# EAGLE board lightmeter_proto1 (EAGLE 7.1.0)
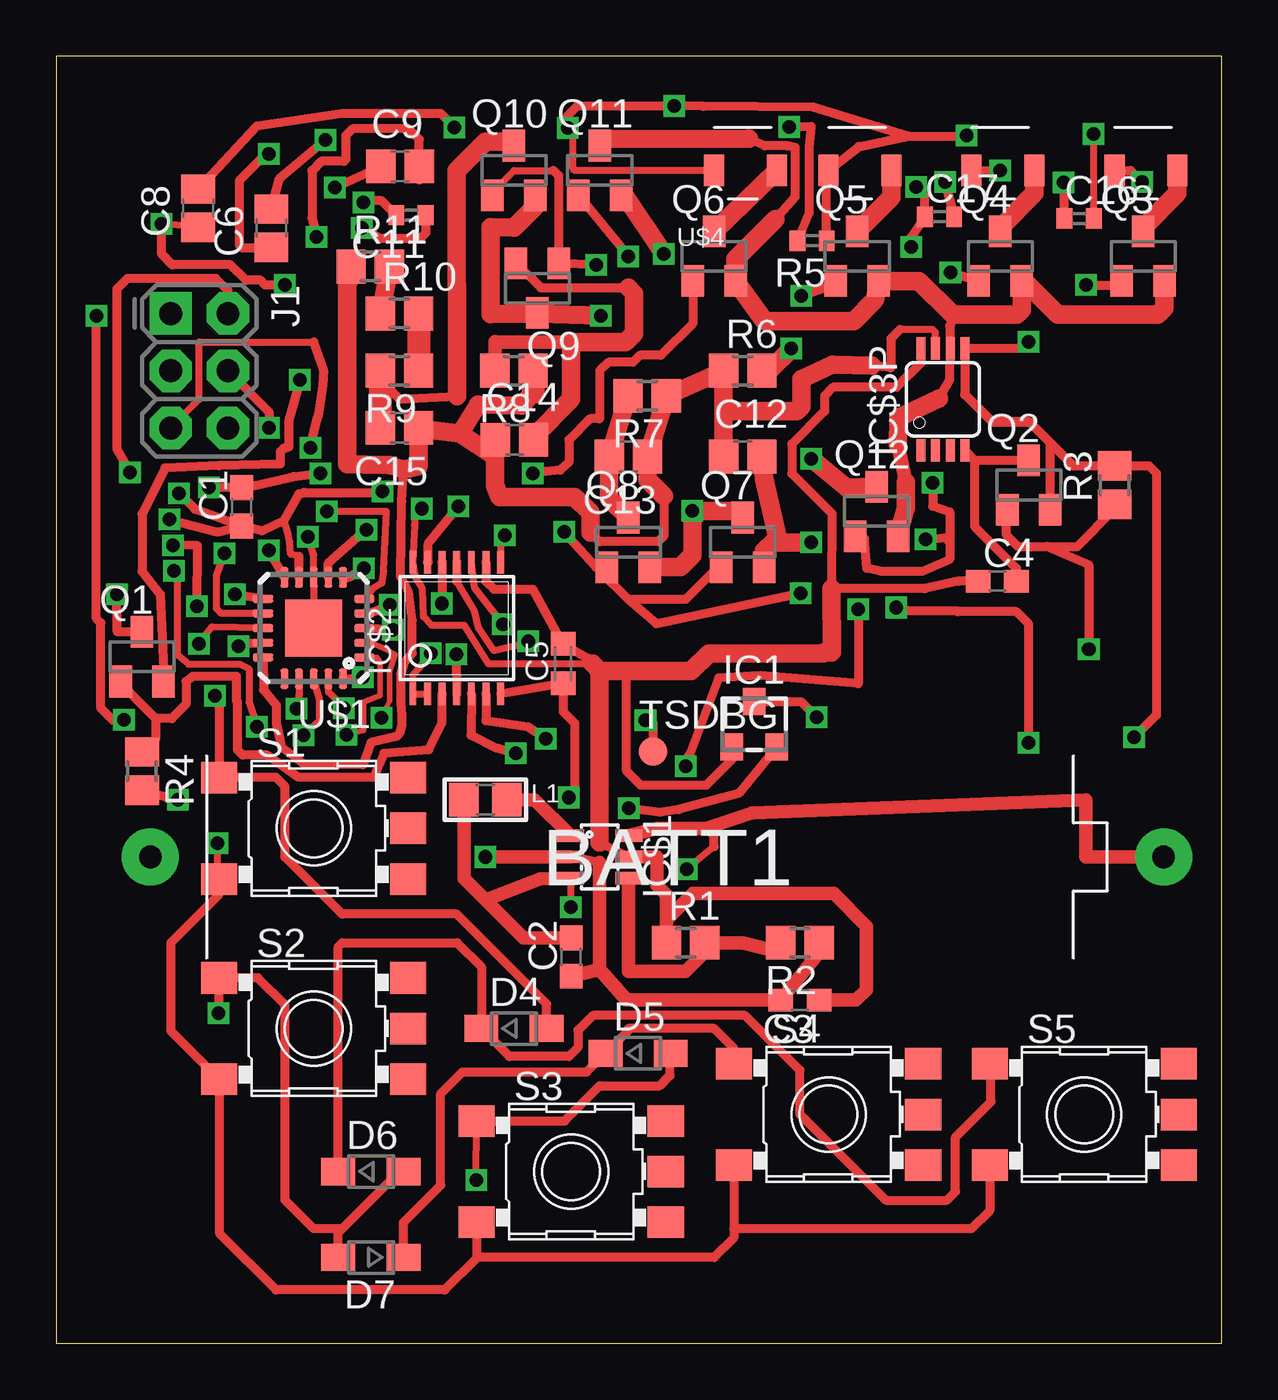
[diagram p0: board, top side]
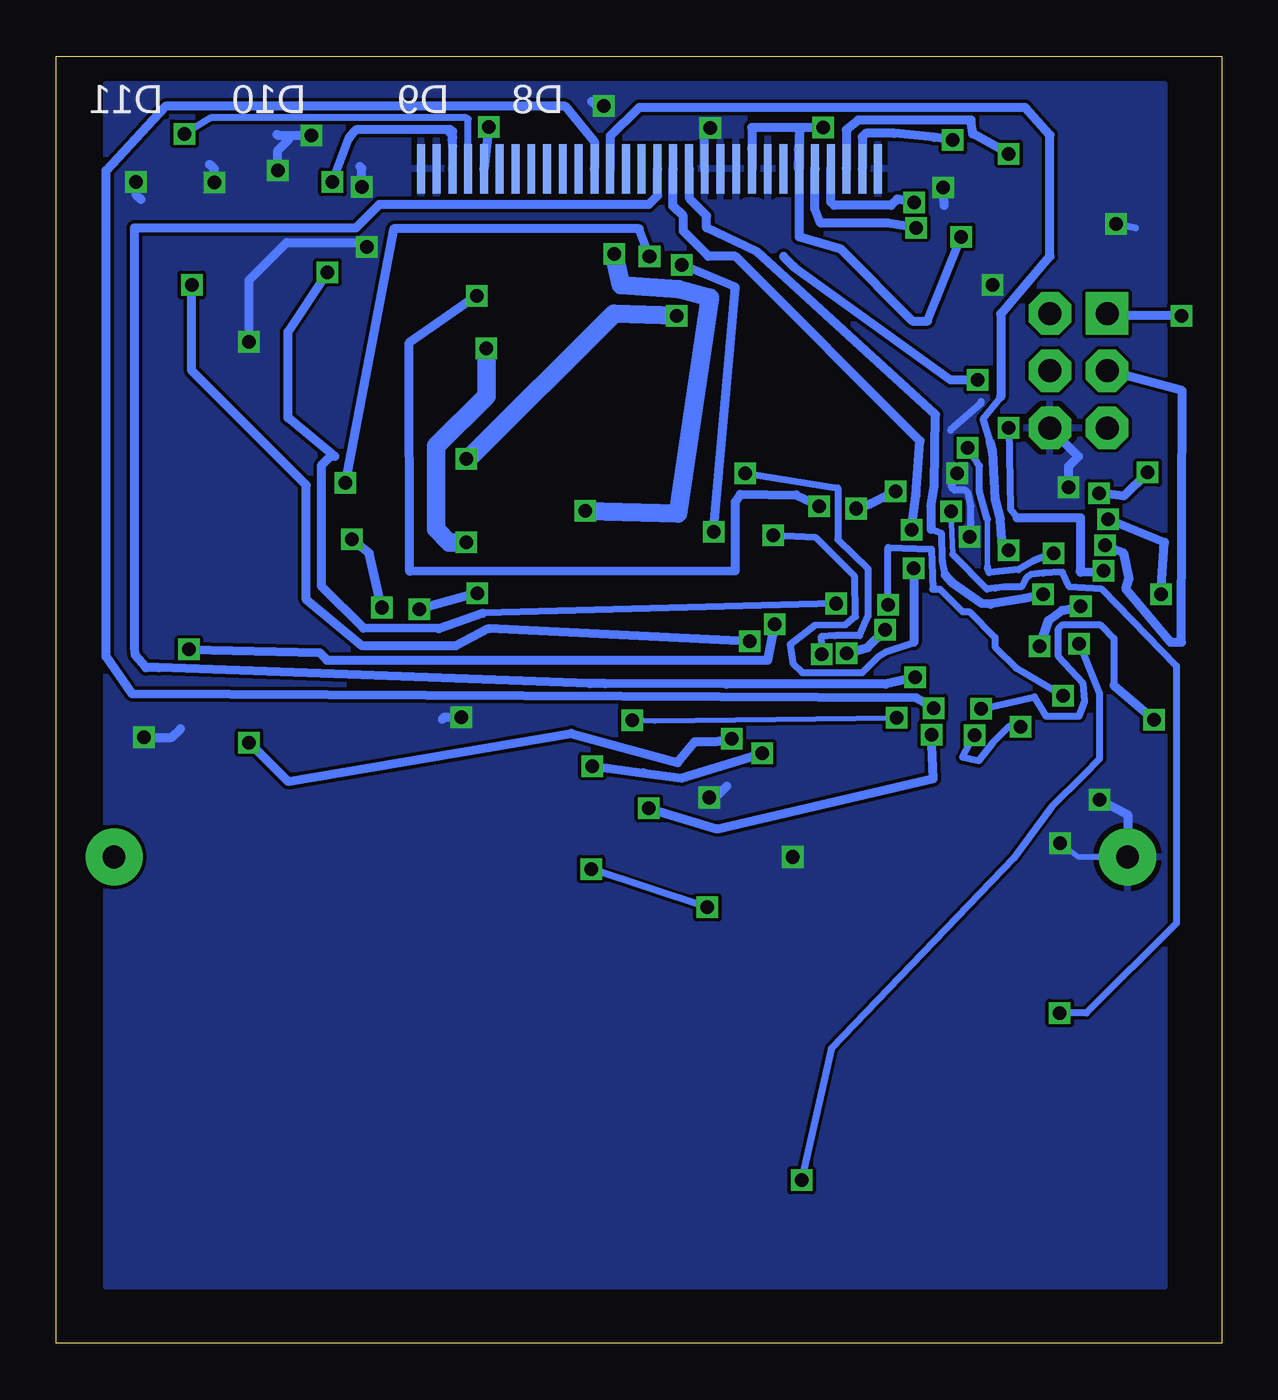
[diagram p1: board, bottom side, seen from below]

Size 51.74 x 57.14 mm. Coordinates in mm from the lower left corner, seen from the top.
Outline: 0,0 51.74,0 51.74,57.14 0,57.14 0,0
Copper layers (1*16): Top 0.0356mm / dielectric 1.5011mm / Bottom 0.0356mm
Design rules "LaenPCBOrder": minimum track width 6mil, minimum drill 13mil, track to track 6mil, track to pad 6mil, pad to pad 6mil, via to via 6mil, smd to smd 6mil, copper to edge 15mil, drill to drill 6mil, minimum pad ring 7mil, minimum via ring 7mil, stop-mask expansion 3mil, vias tented up to drill 0mil, thermal gap 10mil

## Footprints (pad centres in the part's own frame; a part is rotated, then mirrored left to right if it is on the bottom)
12BH412 = drill 1 pad 2.54: + 22.5,0; - -22.5,0
C1608 = smd 1.1 x 1: 1 -0.85,0; 2 0.85,0
C0603K = smd 1.05 x 1.08: 1 -0.875,0; 2 0.875,0
C2012 = smd 1.3 x 1.5: 1 -0.85,0; 2 0.85,0
C0402 = smd 0.7 x 0.9: 1 -0.65,0; 2 0.65,0
SOD323-W = smd 1.5 x 1.2: A 1.45,0; C -1.45,0
VEMD2523SLX01 = smd 0.889 x 1.397: P$1 -3.81,3.81; P$2 -1.016,3.81
SOT-23B = smd 1 x 1.2: 1 -1,-1; 2 1,-1; 3 0,1
SOT23-6L = smd 0.55 x 1.2: 1 -0.95,-1.3; 2 0,-1.3; 3 0.95,-1.3; 4 0.95,1.3; 5 0,1.3; 6 -0.95,1.3
TSSOP14 = smd 0.305 x 0.991: 1 -1.95,-2.918; 2 -1.3,-2.918; 3 -0.65,-2.918; 4 0,-2.918; 5 0.65,-2.918; 6 1.3,-2.918; 7 1.95,-2.918; 8 1.95,2.918; 9 1.3,2.918; 10 0.65,2.918; 11 0,2.918; 12 -0.65,2.918; 13 -1.3,2.918; 14 -1.95,2.918
MSOP08 = smd 0.4 x 1: 1 -0.976,-2.263; 2 -0.326,-2.263; 3 0.324,-2.263; 4 0.974,-2.263; 5 0.974,2.262; 6 0.324,2.262; 7 -0.326,2.262; 8 -0.976,2.262
2X3-NS = drill 1.016 pad 1.88 square: 1 -2.54,-1.27 | drill 1.016 pad 1.88 octagon: 2 -2.54,1.27; 3 0,-1.27; 4 0,1.27; 5 2.54,-1.27; 6 2.54,1.27
0805 = smd 1.3 x 1.5: 1 -0.95,0; 2 0.95,0
SOT23 = smd 1 x 1.4: 1 -0.95,-1.1; 2 0.95,-1.1; 3 0,1.1
R2012 = smd 1.3 x 1.5: 1 -0.85,0; 2 0.85,0
R0402 = smd 0.7 x 0.9: 1 -0.65,0; 2 0.65,0
SKHMPXE010 = smd 1.6 x 1.4: 1 -4.2,2.25; 2 4.2,2.25; 3 -4.2,-2.25; 4 4.2,-2.25; 5 4.2,0
B1,27 = smd 1.27 x 1.27: TP 0,0
MLF20 = smd 0.9 x 0.35: 1 -2.25,1.3; 2 -2.25,0.65; 3 -2.25,0; 4 -2.25,-0.65; 5 -2.25,-1.3; 11 2.25,-1.3; 12 2.25,-0.65; 13 2.25,0; 14 2.25,0.65; 15 2.25,1.3 | smd 0.35 x 0.9: 6 -1.3,-2.25; 7 -0.65,-2.25; 8 0,-2.25; 9 0.65,-2.25; 10 1.3,-2.25; 16 1.3,2.25; 17 0.65,2.25; 18 0,2.25; 19 -0.65,2.25; 20 -1.3,2.25 | smd 2.54 x 2.54: GND 0,0
UG-2864HSWEG01_0.96IN_WRAPAROUND = smd 0.35 x 2.2 bottom: 1 -10.15,-1.2; 2 -9.45,-1.2; 3 -8.75,-1.2; 4 -8.05,-1.2; 5 -7.35,-1.2; 6 -6.65,-1.2; 7 -5.95,-1.2; 8 -5.25,-1.2; 9 -4.55,-1.2; 10 -3.85,-1.2; 11 -3.15,-1.2; 12 -2.45,-1.2; 13 -1.75,-1.2; 14 -1.05,-1.2; 15 -0.35,-1.2; 16 0.35,-1.2; 17 1.05,-1.2; 18 1.75,-1.2; 19 2.45,-1.2; 20 3.15,-1.2; 21 3.85,-1.2; 22 4.55,-1.2; 23 5.25,-1.2; 24 5.95,-1.2; 25 6.65,-1.2; 26 7.35,-1.2; 27 8.05,-1.2; 28 8.75,-1.2; 29 9.45,-1.2; 30 10.15,-1.2

## Placement (x,y rotation side)
BATT1  AAA  [12BH412]  26.67,21.59 0 top
C1  µ1  [C1608]  8.23,37.13 90 top
C2  4µ7  [C1608]  22.86,17.14 90 top
C3  4µ7  [C1608]  33.02,15.24 180 top
C4  µ1  [C1608]  41.78,33.83 0 top
C5  µ1  [C0603K]  22.5,30.18 90 top
C6  1µ  [C2012]  9.55,49.5 90 top
C8  1µ  [C2012]  6.3,50.39 90 top
C9  1µ  [C2012]  15.27,52.25 0 top
C11  1µ  [C0402]  15.75,50.09 180 top
C12  4µ7  [C2012]  30.48,39.37 0 top
C13  4µ7  [C2012]  25.4,39.37 180 top
C14  4µ7  [C2012]  20.35,40.11 0 top
C15  4µ7  [C2012]  15.24,40.64 180 top
C16  4µ7  [C0402]  45.42,49.94 0 top
C17  2µ2  [C0402]  39.22,50.01 0 top
D4  [SOD323-W]  20.32,13.97 0 top
D5  [SOD323-W]  25.83,12.88 0 top
D6  [SOD323-W]  13.97,7.62 0 top
D7  [SOD323-W]  13.97,3.81 180 top
D8  VEMD2523SLX01  [VEMD2523SLX01]  33.02,48.26 0 top
D9  VEMD2523SLX01  [VEMD2523SLX01]  38.1,48.26 0 top
D10  VEMD2523SLX01  [VEMD2523SLX01]  44.45,48.26 0 top
D11  VEMD2523SLX01  [VEMD2523SLX01]  50.8,48.26 0 top
IC1  TC1047SOT-23B  [SOT-23B]  30.99,27.48 0 top
IC$1  TI-TLV61220  [SOT23-6L]  24.13,21.59 270 top
IC$2  SN74HC164TSSOP-14  [TSSOP14]  17.78,31.75 0 top
IC$3P  AD8542RM  [MSOP08]  39.37,41.91 0 top
J1  AVR_SPI_PRG_6NS  [2X3-NS]  6.35,43.18 270 top
L1  4µ7  [0805]  19.05,24.13 0 top
Q1  BSS123  [SOT23]  3.81,30.48 0 top
Q2  BSS123  [SOT23]  43.18,38.1 0 top
Q3  BSS123  [SOT23]  48.26,48.26 0 top
Q4  BSS123  [SOT23]  41.91,48.26 0 top
Q5  BSS123  [SOT23]  35.56,48.26 0 top
Q6  BSS123  [SOT23]  29.21,48.26 0 top
Q7  BSS84  [SOT23]  30.48,35.56 0 top
Q8  BSS123  [SOT23]  25.4,35.56 0 top
Q9  BSS84  [SOT23]  21.36,46.84 180 top
Q10  BSS123  [SOT23]  20.32,52.07 0 top
Q11  BSS84  [SOT23]  24.13,52.07 0 top
Q12  BSS123  [SOT23]  36.42,36.93 0 top
R1  1M  [R2012]  27.94,17.78 0 top
R2  220k  [R2012]  33.02,17.78 180 top
R3  10k  [R2012]  46.99,38.1 90 top
R4  10k  [R2012]  3.81,25.4 270 top
R5  390k  [R0402]  33.55,48.95 180 top
R6  16k  [R2012]  30.48,43.18 0 top
R7  130k  [R2012]  26.24,42.06 180 top
R8  390k  [R2012]  20.32,43.18 180 top
R9  1M  [R2012]  15.24,43.18 180 top
R10  1M  [R2012]  15.24,45.72 0 top
R11  1M  [R2012]  13.94,47.8 0 top
S1  SKHMPSE010  [SKHMPXE010]  11.43,22.86 0 top
S2  SKHMPSE010  [SKHMPXE010]  11.43,13.97 0 top
S3  SKHMPSE010  [SKHMPXE010]  22.86,7.62 0 top
S4  SKHMPSE010  [SKHMPXE010]  34.29,10.16 0 top
S5  SKHMPSE010  [SKHMPXE010]  45.64,10.16 0 top
TSDBG  TPB1,27  [B1,27]  26.49,26.26 0 top
U$1  ATTINY1634MLF20  [MLF20]  11.43,31.75 180 top
U$4  [UG-2864HSWEG01_0.96IN_WRAPAROUND]  25.4,53.34 0 top

## Library data of the parts
BATT1 = adafruit
C1-C6 C8 C9 C11-C17 = rcl
D4-D7 = diode2
D8-D11 IC$2 = lightmeter
IC1 = tc1047
IC$1 = custom
IC$3P = analog-devices; MPN: AD8542ARZ; OC_FARNELL: 1464965; OC_NEWARK: 19M0965
J1 = SparkFun-Connectors
L1 U$4 = microbuilder
Q1-Q12 = transistor-small-signal
R1-R11 = resistor; SPICEPREFIX: R
S1-S5 = switch
TSDBG = testpad
U$1 = attiny1634

## Nets
AVRMISO: J1.1 U$1.17
AVRMOSI: J1.4 U$1.18
AVRRST: J1.5 U$1.12
AVRSCK: J1.3 U$1.14
DIODESW$1: IC$2.4 Q6.1
DIODESW$2: IC$2.13 Q5.1
DIODESW$3: IC$2.12 Q4.1
DIODESW$4: IC$2.11 Q3.1
GND: BATT1.- C1.2 C2.1 C3.2 C5.1 C8.1 C9.1 C16.1 C17.1 D8.P$1 D9.P$1 D10.P$1 D11.P$1 IC1.3 IC$1.2 IC$2.7 IC$3P.5 J1.6 Q2.2 R2.1 R3.2 R4.2 R5.1 S1.3 S2.3 S3.3 S4.3 S5.3 U$1.8 U$1.GND U$4.1 U$4.8 U$4.10 U$4.11 U$4.12 U$4.29 U$4.30
N$1: IC$1.1 L1.2
N$2: D8.P$2 Q6.3
N$3: C14.2 Q9.2 R8.2
N$4: C12.2 Q7.2 R6.2
N$5: D9.P$2 Q5.3
N$6: C4.2 IC$3P.4 Q2.3
N$7: D5.C D7.C S4.1
N$8: D4.C D6.C S5.1
N$9: D10.P$2 Q4.3
N$10: IC$1.4 R1.2 R2.2
N$11: D11.P$2 Q3.3
N$12: C16.2 U$4.27
N$13: R9.1 R10.2
N$14: C13.2 Q8.3 R7.2
N$15: C6.2 U$4.2
N$16: C6.1 U$4.3
N$17: C8.2 C9.2 U$4.6 U$4.9
N$18: R10.1 R11.2
N$19: R5.2 U$4.26
N$20: Q9.3 Q10.2 Q12.3
N$21: C15.2 Q10.3 R9.2
N$22: Q7.3 Q8.2 Q11.2
N$23: TSDBG.TP U$1.2
N$24: C11.1 U$4.5
N$25: C17.2 U$4.28
N$26: IC$3P.6 Q3.2 Q4.2 Q5.2 Q6.2 Q11.3 Q12.2
N$27: C11.2 U$4.4
N$28: IC1.2 U$1.1
OAOUT: C12.1 C13.1 C14.1 C15.1 IC$3P.7 R6.1 R7.1 R8.1 R11.1 U$1.15
OAPWR: IC$2.10 Q2.1 R3.1
PBI$1: D4.A S1.1 U$1.4
PBI$2: D6.A D7.A S2.1 U$1.5
PBI$3: D5.A S3.1 U$1.13
SCRCLK: U$1.10 U$4.18
SCRCS: U$1.11 U$4.13
SCRDAT: U$1.19 U$4.19
SCRDC: U$1.20 U$4.15
SCRPWR: IC$2.3 Q1.1 R4.1
SCRRES: U$1.7 U$4.14
SCRVREG: Q1.2
SRA: IC$2.1 IC$2.2 U$1.3
SRCLK: IC$2.8 U$1.6
STG$1: IC$2.5 Q7.1 Q8.1 Q9.1 Q10.1
STG$2: IC$2.6 Q11.1 Q12.1
VCC: BATT1.+ C2.2 IC$1.3 IC$1.6 L1.1
VREG: C1.1 C3.1 C4.1 C5.2 IC1.1 IC$1.5 IC$2.9 IC$2.14 IC$3P.8 J1.2 Q1.3 R1.1 U$1.9

## Tracks (layer width: path | path; a pad name or v marks a point on that pad's centre or on a via)
AVRMISO  (via drill 0.6)
  Top 0.305: v10.67,28.17 10.78,28.81 U$1.17
  Top 0.406: v3,27.69 2.52,27.66 1.98,28.19 1.98,31.98 1.78,32.18 v1.78,45.62
  Bottom 0.305: v10.67,28.17 8.31,28.7 7.8,27.84 6.32,27.84 6.07,28.5 6.15,29.29 7.24,30.48 7.24,31.72 7.06,31.9 5.39,31.9 4.77,31.29 4.77,29.21
  Bottom 0.406: 4.77,29.21 v3,27.69 | v1.78,45.62 4.98,45.62 J1.1
AVRMOSI  (via drill 0.6)
  Top 0.305: v5.23,34.29 5.36,33.83 5.36,30.58 5.87,30.15 8.15,30.15 8.56,29.95 8.56,28.45 v8.91,27.38 | U$1.18 11.68,28.6 11.68,27.64 v10.97,27
  Top 0.406: J1.4 9.45,41.35 v9.45,40.64
  Bottom 0.305: v9.45,40.64 9.37,37.03 9.07,36.65 | v8.91,27.38 9.45,27.38 10.16,26.67 10.79,25.86 11.51,26.01 v10.97,27
  Bottom 0.406: 9.07,36.65 6.25,36.65 6.27,36.63 6.27,34.27 6.25,34.24 v5.23,34.29
AVRRST  (via drill 0.6)
  Top 0.305: J1.5 6.35,41.91 6.35,44.45 11.43,44.45 | U$1.12 7.33,32.4 7.11,32.61 7.11,34.09 v7.47,35.08
  Top 0.406: 11.43,44.45 11.86,43.2 11.84,42.52 11.66,41.33 11.61,41.12 v11.28,39.75
  Bottom 0.254: 10.39,34.47 10.39,36.58
  Bottom 0.305: v7.47,35.08 8.33,34.75 9.02,34.34 10.31,34.21 10.39,34.47 | 10.39,36.58 10.74,37.85 10.74,38.96 10.85,39.06 10.85,39.09 v11.28,39.75
AVRSCK  (via drill 0.6)
  Top 0.406: v6.25,32.72 6.27,35.41 v5.18,35.43 | v8.08,30.94 8.43,30.99 8.53,31.09 U$1.14
  Bottom 0.406: v5.18,35.43 4.37,35.1 4.11,33.93 4.24,33.48 2.26,31.11 1.78,31.11 1.75,42.29 J1.3 | v8.08,30.94 7.67,32.11 7.09,32.54 v6.25,32.72
DIODESW$1  (via drill 0.6)
  Top 0.406: Q6.1 28.26,45.28 26.85,43.87 25.91,43.87 25.6,43.56 24.51,43.56 24.13,43.18 24.13,41.07 24.11,41.05 23.7,41.05 22.76,40.11 22.76,39.12 22.38,38.76 21.74,38.71 v21.16,38.63 | v17.75,30.58 IC$2.4
  Bottom 0.305: v21.16,38.63 17.04,37.97 17.04,35.69 15.7,34.39 15.7,32.28 16.08,31.42 17.14,31.42 17.78,31.37 v17.75,30.58
DIODESW$2  (via drill 0.6)
  Top 0.406: IC$2.13 16.51,34.67 16.51,35.51 v17.86,37.16 | v33.07,46.51 34.44,46.99 Q5.1
  Bottom 0.406: v33.07,46.51 36.07,44.43 36.04,34.27 21.59,34.29 21.59,37.36 21.36,37.69 18.9,37.67 v17.86,37.16
DIODESW$3  (via drill 0.6)
  Top 0.406: IC$2.12 v17.12,32.84 | v39.7,47.55 Q4.1
  Bottom 0.305: v17.12,32.84 32.79,32.41
  Bottom 0.406: 32.79,32.41 34.75,31.72 38.1,31.75 39.98,33.63 39.98,38.96 39.57,39.37 39.37,39.37 41.45,41.1 41.45,44.91 v39.7,47.55
DIODESW$4  (via drill 0.6)
  Top 0.305: 17.78,33.83 18.57,32.51 18.75,31.75 19.41,30.76 20.37,30.99 v20.96,31.17
  Top 0.406: IC$2.11 17.78,33.83 | v45.72,46.99 47.14,46.99 Q3.1
  Bottom 0.406: v20.96,31.17 32.54,31.72 34.01,30.96 38.15,30.96 40.64,33.02 40.64,38.1 45.72,43.18 v45.72,46.99
GND  (via drill 0.6)
  Top 0.305: S1.3 7.16,20.61 v7.16,22.2 | C8.1 v4.67,49.71 | U$1.GND U$1.8 11.43,35 v11.18,35.81 | D8.P$1 23.02,52.07 U$4.12 22.95,53.71 v22.71,53.95
  Top 0.406: 24.13,21.34 IC$1.2 | S1.3 7.23,19.93 5.08,17.78 5.08,13.87 S2.3 7.26,11.69 7.26,4.85 9.75,2.36 17.25,2.36 18.66,3.78 | S3.3 18.66,3.78 | S4.3 30.09,5.08 | 30.09,5.08 30.09,4.69 29.21,3.81 18.69,3.81 18.66,3.78 | S5.3 41.44,5.88 40.64,5.08 30.09,5.08 | v5.41,24.13 R4.2 4.21,24.55 | IC$3P.5 | Q2.2 44.13,40 | 44.13,40 43.2,40.92 41.55,40.92 40.36,42.11 40.36,44.16 IC$3P.5 | R3.2 45.17,38.95 44.13,40 | IC$2.7 C5.1 22.5,28.04 23.01,27.53 23.01,24.49 v22.76,24.23 | IC1.3 33.06,28.48 v33.76,27.79 | v10.16,46.99 9.27,46.99 9.07,47.19 8.43,47.19 7.72,47.88 5.16,47.88 4.67,48.39 v4.67,49.71 | v6.78,38 6.8,37.98 C1.2 8.89,38.1 10.54,38.48 v11.74,38.63 | D11.P$1 47.7,52.07 v48.21,51.56 | C16.1 44.77,51.5 v44.73,51.54 | v38.18,51.33 38.57,50.94 C17.1 37.95,49.09 v37.95,48.67 | D10.P$1 v41.91,52.07 | D9.P$1 35.66,53.14 37.85,53.59 40.39,53.59 v40.41,53.62 | 27.25,54.76 v27.43,54.94 | v27.43,54.94 23.14,54.94 22.71,54.51 v22.71,53.95 | R5.1 34.2,51.98 D9.P$1 | D9.P$1 35.64,53.14 37.82,53.59 33.6,54.89 28.73,54.92 v27.43,54.94 | C9.1 v12.37,51.31 | IC$3P.5 40.34,42.15 40.33,42.14 40.33,42.11 41.55,40.89 43.2,40.89 45.14,38.96 48.51,38.96 48.84,38.63 48.84,27.89 v47.85,26.9 | IC$3P.5 42.9,44.17 v43.18,44.45
  Top 0.61: IC$1.2 v19.05,21.59 | C2.1 24.11,16.59 | 24.11,16.59 24.13,17.78 24.13,21.34 | R2.1 33.71,17.14 C3.2 25.31,15.24 24.11,16.59
  Bottom 0.254: v7.16,22.2 6.35,21.59 BATT1.-
  Bottom 0.305: v4.67,49.71 3.81,49.53 | 11.99,38.18 11.99,38 11.86,37.87 11.38,37.87 11.25,37.74 11.13,37.19 11.13,36.45 v11.18,35.81 | 12.04,40.54 10.67,41.73 10.67,41.81
  Bottom 0.406: v5.41,24.13 4.17,23.47 BATT1.- | J1.6 6.35,39.37 6.78,38.94 v6.78,38 | v22.76,24.23 22.48,24.23 21.97,24.74 | v33.76,27.79 34.52,27.79 34.59,27.71 | v48.21,51.56 48.21,51 47.98,50.78 | v44.73,51.54 44.73,52.15 44.93,52.35 | v38.18,51.33 38.18,52.17 38.25,52.25 | v41.91,52.07 41.91,52.96 41.4,53.47 | v40.41,53.62 41.89,53.62 41.94,53.67 | v27.43,54.94 27.76,54.94 27.96,55.14 | v12.37,51.31 12.32,50.52 | v47.85,26.9 46.61,26.9 46.23,27.28 | v43.18,44.45 43.18,47.19 41.5,48.87 38.05,48.87 v37.95,48.67 | v11.74,38.63 11.61,38.56 11.99,38.18 | U$4.12 22.95,53.71 v22.71,53.95
  pour Bottom: 2.54,55.88 49.53,55.88 49.53,2.54 2.54,2.54
N$1
  Top 0.61: L1.2 21.24,24.13 IC$1.1
N$2
  Top 0.813: D8.P$2 Q6.3
N$3
  Top 0.406: Q9.2 20.44,47.94 21.51,46.86 25.4,46.86 25.63,46.86
  Top 0.61: 22.86,44.45 19.51,44.45 19.48,44.48 19.48,43.19 R8.2
  Top 0.813: C14.2 21.17,40.22 22.86,41.91 22.86,44.45 25.27,44.45 25.65,44.83 25.65,46.61 25.4,46.86
N$4  (via drill 0.6)
  Top 0.813: Q7.2 31.43,35.19 31.8,35.56 | 31.8,35.56 32.03,35.79 31.42,38.42 C12.2 | R6.2 31.65,43.18 v32.64,44.17 | v33.53,35.56 31.8,35.56
  Bottom 0.813: v32.64,44.17 32.64,42.06 34.87,39.83 34.87,36.14 34.29,35.56 v33.53,35.56
N$5
  Top 0.813: D9.P$2 37.08,50.88 Q5.3
N$6
  Top 0.406: Q2.3 40.79,39.2 | 40.79,39.2 IC$3P.4 | C4.2 42.63,34.41 40.79,36.25 40.79,39.2
N$7
  Top 0.406: D7.C 15.42,5.36 17.07,7.01 17.07,11.07 18.03,12.04 23.54,12.04 D5.C 25.4,13.9 25.4,13.97 29.21,13.97 30.09,13.09 S4.1
N$8
  Top 0.406: D6.C 12.52,17.6 12.7,17.78 17.81,17.78 18.87,16.71 D4.C 20.11,12.72 22.76,12.72 23.17,13.13 23.17,13.89 23.82,14.55 30.58,14.55 33.02,12.12 33.02,10.16 36.83,6.35 39.55,6.35 39.93,6.73 39.93,9.14 41.5,10.72 41.5,12.35 S5.1
N$9
  Top 0.305: 41.91,49.53 Q4.3
  Top 0.813: D10.P$2 43.43,51.05 41.91,49.53
N$10
  Top 0.61: IC$1.4 25.4,20.61 25.4,16.51 27.94,16.51 28.79,17.36 R1.2 30.48,17.78 32.17,17.36 R2.2
N$11
  Top 0.305: 48.26,49.53 Q3.3
  Top 0.813: D11.P$2 49.78,51.05 48.26,49.53
N$12  (via drill 0.6)
  Top 0.305: v46.05,53.7 46.05,49.95 C16.2
  Bottom 0.305: U$4.27 33.45,54.35 33.53,54.41 44.88,54.41 v46.05,53.7
N$13
  Top 1.016: R10.2 R9.1
N$14
  Top 0.813: R7.2 C13.2 24.55,37.51 Q8.3
N$15  (via drill 0.6)
  Top 0.406: C6.2 9.92,51.73 v11.94,53.42
  Bottom 0.406: v11.94,53.42 12.75,53.54 14.53,53.72 15.8,53.72 15.95,53.57 U$4.2
N$16  (via drill 0.6)
  Top 0.406: v9.45,52.81 9.32,52.81 8.13,51.61 8.13,48.77 8.25,48.64 9.54,48.64 C6.1
  Bottom 0.406: v9.45,52.81 11.05,53.7 11.13,54.31 16.13,54.31 16.66,53.87 16.66,52.15 U$4.3
N$17  (via drill 0.6)
  Top 0.406: C8.2 8.91,54.05 12.7,54.61 17.07,54.61 v17.68,53.98 | 16.11,51.65 C9.2 16.11,53.45 15.65,53.92 13.16,53.92 12.85,53.62 12.85,52.55 12.78,52.48 11.76,52.48 11.35,52.07 11.35,49.96 v11.56,49.12
  Bottom 0.406: U$4.6 18.75,49.12 16.92,48.59 13.72,45.39 13.06,45.39 v11.56,49.12 | v17.68,53.98 18.59,53.98 18.75,53.82 | 18.75,53.06 18.8,53.01 18.75,53.82 | U$4.6 18.8,52.19 18.72,53.98 20.85,53.98 20.85,53.04 U$4.9 | 18.75,53.82 U$4.6
N$18
  Top 0.813: R10.1 R11.2
N$19  (via drill 0.6)
  Top 0.406: v32.54,54 33.51,54.02 33.43,53.11 33.43,50.19 R5.2
  Bottom 0.406: v32.54,54 U$4.26
N$20  (via drill 0.6)
  Top 0.813: Q10.2 21.27,50.48 20.32,49.53 19.28,49.56 19.28,45.7 21.34,45.72 | Q12.3 35.08,38 v33.53,39.27 | v24.18,45.62 21.38,45.72 Q9.3
  Top 1.016: 21.34,45.72 Q9.3
  Bottom 0.813: v33.53,39.27 33.43,39.27 26.97,45.72 v24.18,45.62
N$21
  Top 0.406: 14.45,42.7 15.24,41.91 17.81,42.06 | 17.58,48.82 17.78,49.02
  Top 0.61: 14.45,43.08 14.45,42.7
  Top 0.813: 20.15,53.34 19.05,53.34 17.78,52.07 17.78,49.02 17.78,46.97 17.81,46.97 17.81,42.06
  Top 1.016: C15.2 R9.2 14.45,43.18 14.45,43.08 | 20.15,53.34 Q10.3
N$22  (via drill 0.6)
  Top 0.813: Q11.2 25.23,50.97 v26.97,48.36 | Q7.3 30.18,36.96 v28.25,36.96 28.25,35 27.71,34.47 Q8.2
  Bottom 0.813: v26.97,48.36 26.67,46.99 24.11,46.81 22.71,46.43 24.13,36.83 v28.25,36.96
N$23  (via drill 0.6)
  Top 0.254: U$1.2 13.96,31.1 14.35,30.94 14.66,30.81 15.04,30.58 14.81,29.85 14.81,28.52 v14.43,27.76 | v26.16,27.66 26.49,27.56
  Top 0.406: 26.49,27.56 TSDBG.TP
  Bottom 0.254: v14.43,27.76 25.15,27.64 v26.16,27.66
N$24  (via drill 0.6)
  Top 0.406: C11.1 16.4,49.29 16.15,49.05 14.4,49.05 v13.56,49.53
  Bottom 0.406: v13.56,49.53 14.83,49.73 17.81,49.73 18.06,50.37 U$4.5
N$25  (via drill 0.6)
  Top 0.406: C17.2 v39.47,51.56
  Bottom 0.254: 34.14,53.14 U$4.28
  Bottom 0.305: 34.21,53.87 34.21,53.42 34.11,53.26 34.14,53.54 34.39,53.87
  Bottom 0.406: v39.47,51.56 38.73,53.52 38.53,53.77 38.43,53.87 34.39,53.87 34.21,53.87 34.14,53.8 34.14,53.54 34.14,53.14 | 34.16,52.15 U$4.28
N$26
  Top 0.406: 39.19,41.94 39.67,42.77 IC$3P.6 39.67,45.16 39.8,45.67 | 31.93,49.91 32.82,50.9 32.82,53.09 32.44,53.16 31.44,53.16 30.76,53.49
  Top 0.61: 37.72,38.23 37.36,39.9
  Top 0.813: 42.88,47.15 42.88,45.9 42.65,45.67 39.8,45.67 38.31,47.16 Q5.2 36.36,46.34 35.41,45.39 31.45,45.39 Q6.2 30.16,48.14 31.93,49.91 | 42.88,47.15 Q4.2 | 42.88,47.15 43,47.15 44.47,45.67 48.92,45.67 49.2,45.95 Q3.2 | 30.76,53.49 24.43,53.47 Q11.3 | Q12.2 37.72,37.11 37.72,38.23 | 37.36,39.9 37.39,41.1 39.19,41.94
N$27  (via drill 0.6)
  Top 0.406: C11.2 15.09,50.09 14.45,50.72 13.77,50.72 v13.64,50.65
  Bottom 0.406: v13.64,50.65 14.4,50.8 14.68,50.52 17.2,50.52 17.35,50.67 U$4.4
N$28  (via drill 0.6)
  Top 0.254: U$1.1 14.25,30.46 14.38,30.25 14.38,28.75 13.64,28.47 13.64,27.2 v12.88,27.03
  Top 0.406: IC1.2 30.3,24.41 27.64,23.7 26.8,23.57 v25.43,23.75
  Bottom 0.406: v25.43,23.75 22.4,22.84 12.8,25.07 v12.88,27.03
OAOUT
  Top 0.305: IC$3P.7 39.04,44.88 38.91,45.01 37.47,45.01
  Top 0.381: 15.8,32.11 15.65,33.38 15.29,34.04
  Top 0.406: IC$3P.7 | 26.97,37.62 26.97,35.84 26.72,35.59 24.13,35.59 23.72,35.99 | U$1.15 9.21,29.02 9.78,28.32 9.78,27.51 9.93,26.82 10.01,26.44 11,25.71 13.61,25.68 13.97,26.67 15.11,26.95 15.24,27.08 15.34,27.46 15.34,27.89 15.29,28.42 15.29,29.67 15.47,30.25 15.8,30.63 15.8,32.11 | 15.42,38.79 15.34,37.39 15.29,34.04 | 37.47,45.01 37.06,44.6 37.06,43.31 36.22,43.41
  Top 0.813: 36.22,43.41 34.47,43.46 33.1,42.8 33.1,41.58 32.89,41.38 29.63,41.38 | C15.1 16.09,38.95 15.42,38.79 14.78,38.99 13.69,39.01 12.9,39.04 12.9,46.97 13.1,47.36 R11.1 | 21.17,42.23 20.68,41.63 18.72,41.68 17.93,40.39 | 17.93,40.39 16.11,40.62 | 29.63,41.38 R6.1 R7.1 C13.1 26.25,38.34 26.97,37.62 | 29.63,41.38 C12.1 | 23.72,35.99 23.72,36.88 23.01,37.57 19.68,37.57 19.48,38.08 19.48,39.36 | 19.48,39.36 C14.1 | 19.48,39.36 17.93,40.39
  Top 1.016: R8.1 21.17,42.23 | 16.11,40.62 C15.1
OAPWR  (via drill 0.6)
  Top 0.305: v19.84,31.93 18.57,33.55 IC$2.10
  Top 0.406: R3.1 46.99,37.03 45.31,35.36 42.72,35.36 42.7,35.38 | Q2.1 42.19,36.96 42.19,35.89 42.7,35.38 | 42.7,35.38 43.99,35.38 45.85,34.57 v45.85,30.81
  Bottom 0.406: v45.85,30.81 40.06,30.66 39.73,30.33 20.14,30.33 v19.84,31.93
PBI$1  (via drill 0.6)
  Top 0.406: D4.A 21.77,15.06 17.78,19.05 12.7,19.05 10.16,21.59 10.16,24.71 9.75,25.12 S1.1 7.23,28.27 v7.04,28.75 | U$1.4 14.25,32.54 v14.81,32.79
  Bottom 0.305: v14.81,32.79 14.81,35.33 12.88,35.25 12.83,33.48 12.5,33.48 11.51,32.49 11.2,32.49 10.06,31.34 10.06,30.91 9.12,29.97 v7.04,28.75
PBI$2  (via drill 0.6)
  Top 0.305: v12.01,36.93 14.66,36.93 14.53,34.32 14.45,33.75 14.02,33.48 U$1.5
  Top 0.406: D6.A 15.24,7.62 12.7,5.08 | 12.7,5.08 11.43,5.08 10.16,6.35 10.16,15.01 8.94,16.23 S2.1 7.23,14.7 v7.19,14.66 | D7.A 12.52,4.9 12.7,5.08
  Bottom 0.254: v12.01,36.93 11.94,35.03
  Bottom 0.305: 11.94,35.03 10.41,33.48 10.06,33.53 9.65,33.58 8.89,33.58 8.66,33.98 8.46,34.14 7.93,34.19 7.06,34.24 6.76,33.58 5.31,33.48 2.01,30.07 2.01,18.64 5.99,14.66 v7.19,14.66
PBI$3  (via drill 0.6)
  Top 0.305: U$1.13 6.91,31.8 v6.32,31.06 | v18.64,7.24 S3.1
  Top 0.406: S3.1 22.57,9.87 24.13,11.43 26.8,11.43 27.25,11.89 27.25,12.85 D5.A
  Bottom 0.305: v6.32,31.06 5.41,28.8 5.41,25.96 6.15,25.2 7.54,23.82 9.22,21.54 17.32,13.08 v18.64,7.24
SCRCLK  (via drill 0.6)
  Top 0.406: U$1.10 v9.45,35.2
  Bottom 0.305: 9.8,42.01 10.59,41.02 10.29,40.01
  Bottom 0.406: v9.45,35.2 9.7,35.1 9.83,36.55 10.06,37.49 10.18,39.6 10.29,40.01 | U$4.18 27.15,53.59 25.86,54.86 8.71,54.86 7.62,53.65 7.62,48.26 9.8,45.7 9.8,42.01
SCRCS  (via drill 0.6)
  Top 0.406: U$1.11 v7.93,33.25
  Bottom 0.305: 12.27,34.11 12.39,34.75 12.42,35.94 12.9,36.14 | U$4.13 23.62,52.11
  Bottom 0.406: v7.93,33.25 8.74,33.07 10.26,32.82 10.64,32.84 11.96,33.78 12.27,34.11 | 23.62,52.11 23.62,50.83 22.86,50.06 22.86,49.53 20.63,48.46 12.7,41.22 12.75,38.08 12.9,37.14 12.9,36.14
SCRDAT  (via drill 0.6)
  Top 0.305: U$1.19 12.09,28.9 v12.78,28.19
  Bottom 0.406: v12.78,28.19 13.56,28.65 48.36,28.83 49.53,30.48 49.53,52.07 46.89,54.92 29.13,54.92 27.85,53.35 U$4.19
SCRDC  (via drill 0.6)
  Top 0.406: U$1.20 v13.61,29.57
  Bottom 0.406: U$4.15 25.04,50.95 25.43,50.57 37.39,50.57 38.43,49.53 48.26,49.53 48.26,30.96 48.23,30.56 47.75,30 47.19,30 28.04,29.29 27.36,29.29 22,29.26 14.91,29.26 v13.61,29.57
SCRPWR
  Top 0.406: Q1.1 2.86,29.3 4.42,27.74 | IC$2.3 17.12,27.53 16.54,26.34 14.55,26.19 14.1,25.12 10.77,25.12 9.37,26.11 8.28,26.11 8.05,26.34 8.05,28.47 8,28.52 8,29.62 6.07,29.62 5.77,29.39 5.77,28.37 5.13,27.74 4.42,27.74 | 4.42,27.74 4.42,26.86 R4.1
SCRRES  (via drill 0.6)
  Top 0.406: U$1.7 12.08,34.64 v13.77,36.12
  Bottom 0.406: U$4.14 24.36,50.5 23.9,50.04 23.9,49.38 22.78,48.26 21.59,48.26 13.39,40.06 13.56,37.64 v13.77,36.12
SCRVREG  (via drill 0.6)
  Top 0.406: v10.82,42.77 10.36,41.12 10.34,40.87 10.34,39.8 10.14,39.75 10.08,39.73 9.96,39.6 9.96,39.04 7.21,38.96 4.83,38.86 3.81,36.83 3.81,34.27 4.62,33.25 4.8,29.42 Q1.2
  Bottom 0.406: 19.45,48.25 19,47.8 12.04,42.77 v10.82,42.77
SRA  (via drill 0.6)
  Top 0.305: v16.64,30.63 16.11,29.98 15.82,29.67 IC$2.1 IC$2.2
  Top 0.406: v14.93,31.67 U$1.3
  Bottom 0.406: v16.64,30.63 15.72,30.89 v14.93,31.67
SRCLK  (via drill 0.6)
  Top 0.305: v19.91,35.86 19.73,35.88 IC$2.8
  Top 0.406: U$1.6 12.97,34 v13.67,34.42
  Bottom 0.305: v19.91,35.86 18.01,35.76 16.28,34.04 16.26,32.26 16.69,31.9 18.06,31.88 19.15,31.04 19,30.15 18.62,29.77 15.95,29.77 15.24,30.48 14.88,30.71 13.67,31.11
  Bottom 0.406: v13.67,34.42 13.67,31.11
STG$1  (via drill 0.6)
  Top 0.305: 19.37,51.12 20.32,52.07 22.07,52.07
  Top 0.406: v23.98,47.88 Q9.1 22.3,51.84 22.07,52.07 | v22.56,36.02 23.96,34.46 Q8.1 24.28,34.29 24.13,34.29 25.4,33.02 | Q7.1 29.38,34.46 27.94,33.02 25.4,33.02 | Q10.1 19.37,51.12 | IC$2.5 18.42,27 19.58,26.42 v20.4,26.19 | 25.4,33.02 26.64,31.95 v33.05,33.3 | v35.61,32.59 35.61,29.29 31.24,29.64 29.41,29.54 28.14,26.19 28.07,26.06 v27.94,25.63
  Bottom 0.406: v22.56,36.02 21.59,46.89 v23.98,47.88 | v33.05,33.3 v35.61,32.59 | v27.94,25.63 25.68,25.32 23.98,25.1 v20.4,26.19
STG$2  (via drill 0.6)
  Top 0.406: Q11.1 v25.4,48.26 | v38.91,38.2 38.91,37.16 39.67,36.91 39.67,35.56 | 39.67,35.56 39.67,34.8 38.46,34.27 36.63,34.27 35.99,34.42 35.89,35.72 Q12.1 | IC$2.6 19.07,27.64 20.93,27.38 v21.74,26.85 | v43.18,26.67 43.18,31.93 42.62,32.49 40.03,32.49 40,32.51 37.9,32.51 v37.29,32.66 | v38.61,35.69 39.47,35.76 39.67,35.56
  Bottom 0.406: v25.4,48.26 25.86,49.48 36.75,49.48 v38.91,38.2 | v21.74,26.85 22.45,26.7 23.39,26.7 24.15,25.78 28.88,27.08 41.45,24.94 v43.18,26.67 | v37.29,32.66 37.85,35.08 v38.61,35.69
VCC  (via drill 0.6)
  Top 0.305: IC$1.3 v22.83,19.36 | v27.99,21.06 29.21,22.05
  Top 0.406: 29.21,22.05 29.21,22.56 28.83,22.86
  Top 0.61: BATT1.+ 45.72,21.59 45.72,24.13 30.89,23.55 28.83,22.86 26.67,22.86 IC$1.6 | L1.1 18.1,20.64 19.05,19.68 | 19.05,19.68 21.47,20.63 IC$1.3 | C2.2 20.74,18 19.05,19.68
  Bottom 0.305: v22.83,19.36 v27.99,21.06
VREG  (via drill 0.6)
  Top 0.305: 23.8,30.18 19.18,30.18 18.11,31.88 16.66,31.88 16.31,32.26 16.26,33.5 15.94,34 | 15.94,34 15.9,34.29 | v16.23,37.06 15.9,36.68 15.9,36.32 IC$2.14 15.88,34.2 15.94,34 | 10.78,34.94 10.41,35.03 10.36,35.59 10.29,35.94 10.11,36.53
  Top 0.381: IC$1.5 24.13,22.22
  Top 0.406: IC$2.9 19.08,33.83 19.43,33.48 21.16,33.48 C5.2 23.62,30.4 23.8,30.18 24.13,29.62 | U$1.9 10.78,34.94 | IC$3P.8 38.39,43.53 37.31,42.44 34.49,42.44 34.11,42.06 34.11,41.38 32.66,39.93 32.66,38.61 34.44,36.83 34.42,33.5 38.56,33.5 40.06,33.83 C4.1 | 34.44,30.68 34.42,30.66 | 34.06,30.66 34.04,30.63 | 3.81,31.84 Q1.3 2.71,31.58 v2.69,33.25 | C1.1 9.13,36.07 10.11,36.53 10.78,37.7 11,37.77 14.2,37.77 v14.48,37.82 | v5.03,36.58 7.18,36.02 C1.1 | J1.2 7.62,46.74 7.09,47.27 3.15,47.27 2.69,46.81 2.69,39.7 v3.28,38.66 | v5.44,37.74 6.16,37.03 C1.1 | IC1.1 29.99,25.9 28.85,24.77 25.96,24.77 25.32,25.4 25.32,29.82 25.3,29.85
  Top 0.61: IC$1.5 26.67,21.59 26.67,20.32 27.09,19.9 R1.1 27.09,18.78 28.27,19.96 34.52,19.96 35.97,18.52 35.97,15.7 35.51,15.24 C3.1
  Top 0.813: 24.13,22.22 24.13,29.62 24.13,29.85 | 23.8,30.18 24.13,29.85 | 34.42,33.5 34.44,30.68 | 34.42,30.66 34.06,30.66 | 34.04,30.63 28.97,30.63 28.18,29.85 25.3,29.85 24.13,29.85
  Bottom 0.406: v2.69,33.25 2.54,35.56 v5.03,36.58 | v3.28,38.66 4.34,37.62 v5.44,37.74 | v14.48,37.82 15.6,37.26 v16.23,37.06